# Altium PCB level_switch.PcbDoc
Units mm, origin at the board's own origin, x right, y up, seen from the top; angles counter-clockwise.
Board outline 11.56 x 11.43 mm, 2 copper layers (Top Layer, Bottom Layer); 8 components, 6 nets, 20 pads, 0 vias.
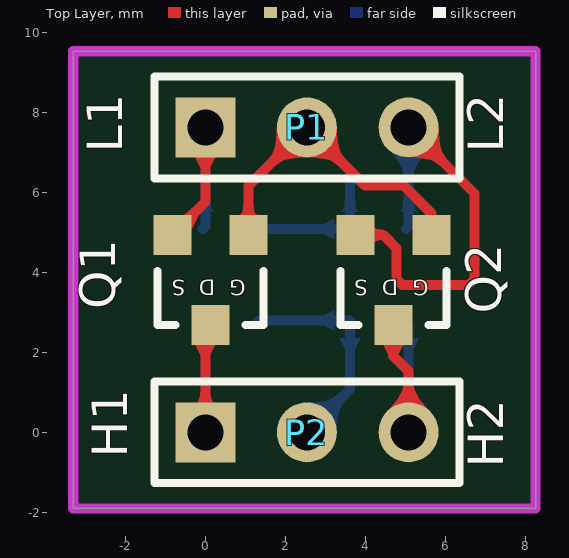
[diagram p0: Top Layer view]
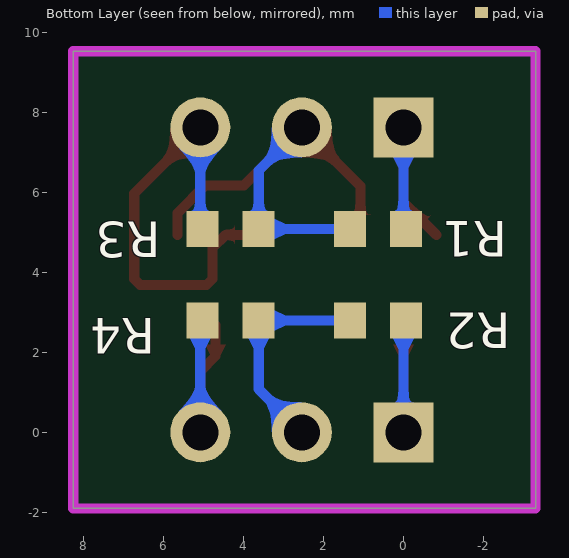
[diagram p1: Bottom Layer view, seen from below]

## Layer stack, top to bottom
Top Solder: solder mask 0.0102, Solder Resist, Dk 3.5
Top Layer: signal copper 0.0356
Dielectric 1: dielectric 0.32, FR-4, Dk 4.8
Bottom Layer: signal copper 0.0356
Bottom Solder: solder mask 0.0102, Solder Resist, Dk 3.5

## Board outline
-3.302,-1.905 -3.302,9.525 8.255,9.525 8.255,-1.905

## Design rules (kind name [scope] priority, off if disabled: settings)
Clearance [All] p1: gap=0.254 ignorepadtopadclearanceinfootprint=FALSE except(0: Arc-Hole Track-Hole SMDPad-Hole THPad-Hole Via-Hole Fill-Hole Poly-Hole Region-Hole Text-Hole)
PolygonConnect [All] p1: connectstyle=Relief reliefconductorwidth=0.254 reliefentries=4 polygonreliefangle="90 Angle" airgapwidth=0.254
RoutingVias [All] p1: holewidth=0.711 width=1.27 viastyle="Through Hole" minholewidth=0.711 minwidth=1.27 maxholewidth=0.711 maxwidth=1.27
SilkToSolderMaskClearance SilkToSolderMaskClearance_1 [HasFootprint('C0603')] p1: minsilkscreentomaskgap=0.03 clearancetoexposedcopper=TRUE
SilkToSolderMaskClearance [IsPad] p2: minsilkscreentomaskgap=0.254 clearancetoexposedcopper=TRUE
SolderMaskExpansion [All] p1: expansion=0.102 istentingtop=FALSE
SupplyNets "Schematic Supply Nets_1" [InNet('VL')] p1: voltage=0.000
SupplyNets "Schematic Supply Nets" [InNet('VH')] p2: voltage=0.000
Width [All] p1: maxlimit=0.254 minlimit=0.254 preferedwidth=0.254
29 further rules are at their usual default settings.

## Components (designator, comment, footprint, x,y, rotation, side; value= is the part's Value field where it differs from the comment)
P1 "Header 3" HDR1X3 0,7.62 r0 top locked
P2 "Header 3" HDR1X3 0,0 r0 top locked
Q1 "MOSFET-N" SOT23-3-MOS 0.127,3.81 r180 top
Q2 "MOSFET-N" SOT23-3-MOS 4.699,3.81 r180 top
R1 "Res1" R0603 0.635,5.08 r0 bottom value=10K
R2 "Res1" R0603 0.635,2.794 r0 bottom value=10K
R3 "Res1" R0603 4.318,5.08 r180 bottom value=10K
R4 "Res1" R0603 4.318,2.794 r180 bottom value=10K

## Footprints (in the part's own frame and the unit in brackets; to place one, negate y for a bottom-side part, rotate by r counter-clockwise, add the part's x,y. Pads: shape width x height; smd on the part's side, far side on the other; paste and mask are expansions set on the pad)
HDR1X3 [mm]
  rect 1.5x1.5 hole 0.9: 1(0,0)
  round 1.5 hole 0.9: 2(2.54,0) 3(5.08,0)
  silkscreen extent -1.27,-1.27 6.35,1.27
R0603 [mm] "Chip Capacitor, Body 1.6x0.8mm, IPC High Density"
  rect 0.8x0.9 smd: 1(-0.7,0) 2(0.7,0)
  body extent -0.87,-0.48 0.87,0.48, height 1.3
SOT23-3-MOS [mm] "SOT-23; 3 Leads; Body 3.0 x 2.5 mm, inc. leads (LxW max)"
  rect 0.95x1 smd: 1(0,1.125) 2(-0.95,-1.125) 3(0.95,-1.125)
  silkscreen extent -1.33,-0.22 1.33,1.13

## Part data
P1 P2: "Header, 3-Pin", LatestRevisionDate=17-Jul-2002, LatestRevisionNote="Re-released for DXP Platform.", Publisher="Altium Limited"
Q1 Q2: "N-Channel MOSFET", LatestRevisionDate=17-Jul-2002, LatestRevisionNote="Re-released for DXP Platform.", PackageDescription="TO, Flat Index; 3 In-Line, Axial Leads; Body Dia. 4.6mm; Lead Dia. 0.5 mm (max)", PackageReference=E3, PackageVersion=1995/1996, Published=8-Jun-2000, Publisher="Altium Limited"
R1 R2 R3 R4: "Resistor", LatestRevisionDate=17-Jul-2002, LatestRevisionNote="Re-released for DXP Platform.", PackageDescription="Axial Device, Thru-Hole; 2 Leads; 0.3 in Pin Spacing", PackageReference=AXIAL-0.3, Published=8-Jun-2000, Publisher="Altium Limited"

## Nets (pads, with @x,y where several pads share a name; then routed paths per layer and width w, separated by ;. In a path a pad name is that pad's centre, name@x,y a point inside that pad or via, vN(x,y) a via of type N, cw(c..) or ccw(c..) an arc to the next point about the centre after c; other vN are vias at no path point)
IH1: P2.1 Q1.1 R2.1 | length 5.6
  Top Layer w0.254: P2.1 0,2.558 Q1.1
  Bottom Layer w0.254: R2.1 0,2.729 P2.1
IH2: P2.3 Q2.1 R4.1 | length 5.7
  Top Layer w0.254: Q2.1 4.699,1.905 5.08,1.524 P2.3
  Bottom Layer w0.254: R4.1 5.08,2.732 P2.3
IL1: P1.1 Q1.3 R1.1 | length 5.6
  Top Layer w0.254: Q1.3 0,5.758 P1.1
  Bottom Layer w0.254: R1.1 0,5.145 P1.1
IL2: P1.3 Q2.3 R3.1 | length 11.1
  Top Layer w0.254: Q2.3 4.445,4.935 4.775,4.605 4.775,3.832 4.924,3.683 6.582,3.683 6.731,3.832 6.731,5.969 P1.3
  Bottom Layer w0.254: R3.1 5.08,5.142 P1.3
VH: P2.2 R2.2 R4.2 | length 5.5
  Bottom Layer w0.254: R2.2 R4.2 3.618,1.078 P2.2
VL: P1.2 Q1.2 Q2.2 R1.2 R3.2 | length 13.1
  Top Layer w0.254: Q1.2 1.077,6.157 P1.2 3.988,6.172 4.953,6.172 5.649,5.476 Q2.2
  Bottom Layer w0.254: R1.2 R3.2 3.618,6.542 P1.2

## Keep-outs
Keep-Out Layer:
  the board outline again, w0.254

## Silkscreen, mask and mechanical layers (free items; w line width, h text height)
Top Overlay:
  text "L1" at -1.778,6.985 h1.52 r90
  text "L2" at 7.747,6.985 h1.52 r90
  text "H1" at -1.651,-0.635 h1.52 r90
  text "H2" at 7.747,-0.889 h1.52 r90

## Text inside footprints (layer, text, board x,y; h text height)
Q1: Top Overlay "G" at 1.016,3.937 h0.65 r180; Top Overlay "S" at -0.508,3.937 h0.65 r180; Top Overlay "D" at 0.254,3.937 h0.65 r180
Q2: Top Overlay "G" at 5.588,3.937 h0.65 r180; Top Overlay "S" at 4.064,3.937 h0.65 r180; Top Overlay "D" at 4.826,3.937 h0.65 r180